# Altium PCB 13CMPA_E5-AH1-FLL357-FR4-0.8_V2.0.PcbDoc
Units mm, origin at the board's own origin, x right, y up, seen from the top; angles counter-clockwise.
Board outline 146.2 x 37.75 mm, 2 copper layers (Top Layer, Bottom Layer); 38 components, 0 nets, 148 pads, 643 vias.
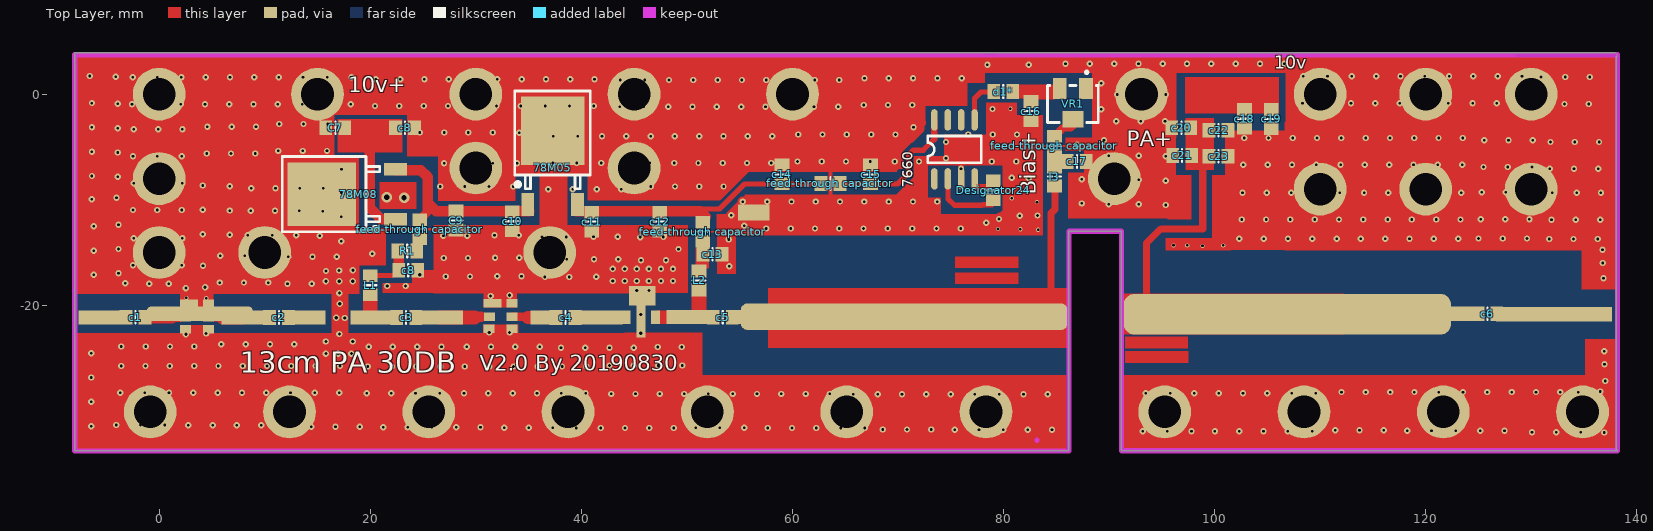
[diagram p0: Top Layer view]
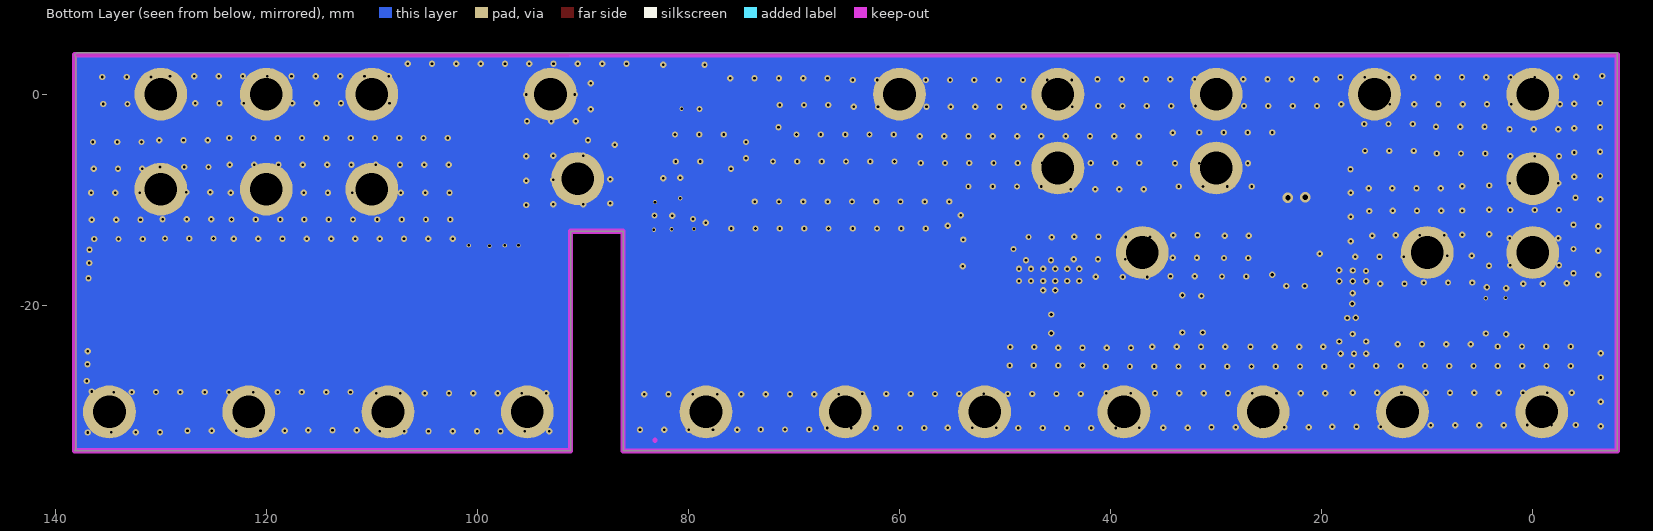
[diagram p1: Bottom Layer view, seen from below]

## Layer stack, top to bottom
Top Layer: signal copper 0.0356
Dielectric: dielectric 0.32, FR-4, Dk 4.8
Bottom Layer: signal copper 0.0356

## Board outline
138.075,3.525 138.075,-33.675 138.175,-33.775 91.175,-33.775 91.175,-12.975 86.2,-12.975 86.2,-33.775 -7.975,-33.775 -8,-33.8 -8.025,-33.775 -8.025,3.95 137.95,3.95 138.175,3.725

## Design rules (kind name [scope] priority, off if disabled: settings)
Clearance [All] p1: gap=0.254
PolygonConnect [All] p1: connectstyle=Relief reliefconductorwidth=0.254 reliefentries=4 polygonreliefangle="90 Angle"
RoutingVias [All] p1: holewidth=0.711 width=1.27 viastyle="Through Hole" minholewidth=0.711 minwidth=1.27 maxholewidth=0.711 maxwidth=1.27
SilkscreenOverComponentPads [IsPad] p1: minsilkscreentomaskgap=0.254
SolderMaskExpansion [All] p1: expansion=0.102
Width [All] p1: maxlimit=1.3 minlimit=0.254 preferedwidth=0.254
27 further rules are at their usual default settings.

## Components (designator, comment, footprint, x,y, rotation, side; value= is the part's Value field where it differs from the comment)
78M05 "7805" LC-TO-252-2 37.275,-10.45 r270 top
78M08 "78M08" LC-TO-252-2 22.4,-9.475 r0 top
7660 "lmc7660" SOP-8 73.45,-8.025 r90 top
c1 "10nf" 6-0805_N -2.253,-21.127 r0 top
c2 "10n" 6-0805_N 11.347,-21.152 r0 top
c3 "10n" 6-0805_N 23.4,-21.15 r0 top
c4 "10n" 6-0805_N 38.5,-21.15 r180 top
c5 "43p" 6-0805_N 53.4,-21.125 r180 top
c6 "100p" 6-0805_N 125.85,-20.8 r180 top
C7 "22uf" 6-0805_N 16.688,-3.179 r180 top
c8 "100p" 6-0805_N 23.6,-16.675 r0 top
c8 "10uf" 6-0805_N 23.288,-3.179 r180 top
C9 "10uf" 6-0805_N 28.125,-11.975 r270 top
c10 "10n" 6-0805_N 33.454,-12.037 r270 top
c11 "10uf" 6-0805_N 40.975,-12.075 r270 top
c12 "10n" 6-0805_N 47.425,-12.075 r270 top
c13 "100p" 6-0805_N 52.425,-15.175 r180 top
c14 "10uf" 6-0805_N 59,-7.6 r90 top
c15 "10n" 6-0805_N 67.4,-7.6 r90 top
c16 "10uf" 6-0805_N 82.6,-1.6 r90 top
c17 "100p" 6-0805_N 86.95,-6.375 r0 top
c18 "22uf" 6-0805_N 102.825,-2.325 r270 top
c19 "22uf" 6-0805_N 105.375,-2.35 r270 top
c20 "10u" 6-0805_N 96.85,-3.175 r180 top
c21 "1uf" 6-0805_N 96.925,-5.8 r180 top
c22 "100n" 6-0805_N 100.375,-3.425 r180 top
c23 "1n" 6-0805_N 100.375,-5.875 r180 top
d1* "4148*" 6-0805_N 79.975,0.25 r0 top
Designator24 "10n" 6-0805_N 79.025,-9.1 r270 top
"feed-through capacitor" "1n" 6-0805_N 24.682,-12.793 r270 top
"feed-through capacitor" "1n" 6-0805_N 63.6,-8.45 r180 top
"feed-through capacitor" "1n" 6-0805_N 84.825,-4.9 r270 top
"feed-through capacitor" "1n" 6-0805_N 51.5,-13.025 r90 top
L1 "12nh" 6-0805_N 20,-18.1 r90 top
L2 "12nh" 6-0805_N 51.15,-17.65 r270 top
l3 "12nh" 6-0805_N 84.825,-7.8 r90 top
R1 "52.3R" 6-0805_N 23.5,-14.85 r180 top
VR1 "1k" RES-ADJ-SMD_3PIN-V-L4.80-W3.50-PITCH1.25 86.575,-0.925 r0 top

## Footprints (in the part's own frame and the unit in brackets; to place one, negate y for a bottom-side part, rotate by r counter-clockwise, add the part's x,y. Pads: shape width x height; smd on the part's side, far side on the other; paste and mask are expansions set on the pad)
6-0805_N [mm] "Chip Resistor, Body 2.0x1.2mm, IPC Medium Density"
  rect 1.2x1.4 smd: 1(-0.9,0) 2(0.9,0)
  silkscreen extent 0,-0.6 0,0.6, body extent -1.07,-0.7 1.07,0.7, height 0.7
LC-TO-252-2 [mm]
  rect 2.2x1.2 smd: 1(0,-2.361) 3(-0.004,2.361)
  rect 6.5x6 smd: 2(-7,0)
  silkscreen extent -10.75,-3.57 -1.5,3.57, body extent -9.74,-3.27 0.2,3.27, height 2.44
RES-ADJ-SMD_3PIN-V-L4.80-W3.50-PITCH1.25 [mm]
  rect 1.3x2 smd: 1(1.25,1.45) 3(-1.25,1.45)
  rect 2x1.6 smd: 2(0,-1.45)
  silkscreen extent -2.4,-1.75 2.4,3.13
SOP-8 [mil]
  oval 80x24 smd: 1(0,0) 2(0,-50) 3(0,-100) 4(0,-150) 5(220,-150) 6(220,-100) 7(220,-50) 8(220,0)
  silkscreen extent 60,-175 160,25, body extent -15,-173 235,24, height 74

## Free pads (board coordinates)
  rect 5x1.336 smd: 0(-5.125,-21.15) 1(20.618,-21.152) 2(41.375,-21.15) 3(50.587,-21.127) 4(26.275,-21.15)
  rrect50% 10x1.336 smd: 0(3.85,-20.8) 1(119.725,-20.8) 4(58.775,-21.125)
  rect 4x1.336 smd: 0(7.918,-21.152) 0(13.76,-21.152)
  rect 3x1.5 smd: 0(56.35,-11.2)
  rrect50% 31x3.85 smd: 0(106.9,-20.85)
  rrect50% 31x2.5 smd: 1(70.6,-21.075)
  rect 3x1.336 smd: 3(36.7,-21.15) 14(124.05,-20.8)
  rect 2.54x1.85 smd: 5(45.761,-19.095)
  rect 0.86x1.27 smd: 6(44.237,-21.127) 6(45.634,-22.397) 6(47.031,-21.127)
  rect 0.86x2 smd: 6(45.634,-20.873)
  rect 1.7x0.81 smd: 8(2.809,-19.876) 8(31.584,-19.826)
  rect 1.05x0.81 smd: 9(2.484,-22.276) 9(2.509,-21.126) 9(4.659,-22.276) 9(4.659,-21.151) 9(4.659,-19.876) 9(31.259,-22.226) 9(31.284,-21.076) 9(33.434,-22.226) 9(33.434,-21.101) 9(33.434,-19.826)
  rect 11x1.336 smd: 16(132.175,-20.85)
  round 5 hole 3.1: 18(0,0) 19(15,0) 20(30,0) 21(37,-15) 21(45,0) 22(60,0) 24(10,-15) 25(110,0) 26(130,0) 27(120,0) 28(130,-9) 29(110,-9) 30(120,-9) 32(90.5,-8) 32(93.072,0) 35(45,-7) 36(30,-7) 37(0,-8) 38(0,-15) 39(-0.85,-30.1) 39(51.941,-30.1) 39(95.275,-30.1) 40(12.348,-30.1) 40(65.139,-30.1) 40(108.473,-30.1) 41(25.545,-30.1) 41(78.336,-30.1) 41(121.67,-30.1) 42(38.743,-30.1) 42(134.868,-30.1)

## Via types
v1: diameter 0.6, hole 0.25, Top Layer to Bottom Layer, 586 vias
v2: diameter 0.6, hole 0.3, Top Layer to Bottom Layer, 43 vias
v3: diameter 0.4, hole 0.25, Top Layer to Bottom Layer, 12 vias
v4: diameter 1, hole 0.5, Top Layer to Bottom Layer, 2 vias

## Nets (pads, with @x,y where several pads share a name; then routed paths per layer and width w, separated by ;. In a path a pad name is that pad's centre, name@x,y a point inside that pad or via, vN(x,y) a via of type N, cw(c..) or ccw(c..) an arc to the next point about the centre after c; other vN are vias at no path point)
pads on no net: 78M05.1 78M05.2 78M05.3 78M08.1 78M08.2 78M08.3 7660.1 7660.2 7660.3 7660.4 7660.5 7660.6 7660.7 7660.8 "feed-through capacitor.1" "feed-through capacitor.2" c1.1 c1.2 c2.1 c2.2 c3.1 c3.2 c4.1 c4.2 c5.1 c5.2 c6.1 c6.2 C7.1 C7.2 c8.1 c8.2 C9.1 C9.2 c10.1 c10.2 c11.1 c11.2 c12.1 c12.2 c13.1 c13.2 c14.1 c14.2 c15.1 c15.2 c16.1 c16.2 c17.1 c17.2 c18.1 c18.2 c19.1 c19.2 c20.1 c20.2 c21.1 c21.2 c22.1 c22.2 c23.1 c23.2 d1*.1 d1*.2 Designator24.1 Designator24.2 L1.1 L1.2 L2.1 L2.2 l3.1 l3.2 R1.1 R1.2 VR1.1 VR1.2 VR1.3
copper on no net: | length 209.4
  Top Layer w0.254: 18.822,-20.69 18.822,-21.134 18.967,-21.279 ; 19.348,-21.533 20.237,-20.644 20.618,-21.152 20.745,-20.771 ; 22.269,-17.088 22.396,-17.088 ; 24.279,-17.11 v2(24.682,-17.11) ; 29.559,-20.676 29.584,-20.701 29.584,-20.826
  Top Layer w0.45: 75.99,-8.025 75.99,-6.09 ; 77.26,-2.437 77.26,-1.166
  Top Layer w0.5: 50.975,-10.875 53.1,-10.875 55.475,-8.5 58.025,-8.5 ; 64.5,-8.5 69.95,-8.5 71,-7.45 71,-5.775 71.475,-5.3 72.4,-5.3 73.427,-4.273 ; 74.745,-8.525 74.745,-9.92 75.35,-10.525 77.95,-10.525 ; 77.26,-1.166 77.26,-0.422 77.882,0.2 78.45,0.2 ; 78.05,-10.475 78.9,-10.475
  Top Layer w0.6: 73.45,-4.273 73.45,-2.437
  Top Layer w0.63: 82.575,-20.875 83.906,-19.544 83.45,-19.544
  Top Layer w0.7: 70.4,-20.875 84.5,-20.875 84.5,-11.9 84.5,-11.275 84.875,-10.9 84.875,-8.825 ; 72.575,-18.7 82.85,-18.7 ; 85.425,-3.454 85.329,-3.454 85.583,-3.2 86.379,-3.2 86.65,-2.929 86.65,-2.05 ; 94.1,-19.775 95.1,-20.775 107.05,-20.775 94.325,-20.775 93.55,-20 93.55,-14.1 94.825,-12.825 ; 94.975,-12.775 98.875,-12.775 98.875,-2.95
  Top Layer w0.8: 5.225,-21.15 7.918,-21.152 ; 24.682,-11.893 25.675,-10.9 ; 33.434,-21.101 34.65,-21.101
  Top Layer w0.9: 1.184,-21.126 2,-21.126
  Top Layer w1: -0.416,-21.126 1.184,-21.126 ; 6.05,-21.15 7.918,-21.152 ; 20,-4.7 19.95,-4.75 19.95,-10.775 20.975,-11.8 ; 21.011,-11.836 22.575,-11.836 ; 22.4,-7.2 24.8,-7.2 25.45,-7.85 25.45,-10.275 ; 25.45,-11 25.45,-10.275 ; 29.284,-21.076 30.484,-21.076 ; 35.05,-11.075 26.775,-11.075 26.25,-11.075 25.45,-10.275 ; 39.55,-11.075 50.825,-11.075 51.25,-11.075 51.8,-11.625 ; 53.6,-8.125 54.85,-6.875 ; 54.025,-6.8 53.125,-7.7 53.125,-8.1 52.6,-8.625 52.6,-9.575 52.95,-9.575 55.697,-6.828 v1(55.697,-6.525) ; v1(54.2,-11.475) 55.3,-10.375 v1(55.3,-10.175) ; 69.686,-6.786 v1(69.686,-6.375) ; 70.275,-9.75 72.025,-8 ; 70.475,-3.35 71.525,-2.3 71.525,-2.275 71.525,-2.025 ; 72.025,-3.25 71.15,-4.125 70.325,-3.725 70.8,-3.725 70.8,-4.4 70.35,-4.85 70.35,-4.525 72.15,-2.725 ; 77.95,-12.375 78.475,-12.375 78.925,-11.925 79.475,-11.925 79.675,-11.725 79.9,-11.725 80.65,-10.975
  Top Layer w1.2: 34.948,-21.152 35.437,-21.152
  Top Layer w1.3: -1.35,-21.1 1.158,-21.1 ; 6.05,-21.15 6.052,-21.152 7.918,-21.152 ; 26.585,-21.15 26.587,-21.152 29.873,-21.152
  other v1: 136.906,-32.05 130.075,-32.025 132.378,-32.025 134.681,-32.025 100.031,-31.95 102.333,-31.95 104.636,-31.95 106.939,-31.95 109.242,-31.95 93.2,-31.925 95.503,-31.925 97.806,-31.925 118.256,-31.875 120.558,-31.875 122.861,-31.875 125.164,-31.875 127.467,-31.875 111.425,-31.85 113.728,-31.85 116.031,-31.85 75.381,-31.8 77.683,-31.8 79.986,-31.8 82.289,-31.8 84.592,-31.8 68.55,-31.775 70.853,-31.775 73.156,-31.775 39.531,-31.625 41.833,-31.625 44.136,-31.625 46.439,-31.625 48.742,-31.625 57.656,-31.625 59.958,-31.625 62.261,-31.625 64.564,-31.625 66.867,-31.625 32.7,-31.6 35.003,-31.6 37.306,-31.6 50.825,-31.6 53.128,-31.6 55.431,-31.6 21.231,-31.55 23.533,-31.55 25.836,-31.55 28.139,-31.55 30.442,-31.55 14.4,-31.525 16.703,-31.525 19.006,-31.525 -6.45,-31.45 2.756,-31.375 5.058,-31.375 7.361,-31.375 9.664,-31.375 11.967,-31.375 -4.075,-31.35 -1.772,-31.35 0.531,-31.35 -6.45,-29.147 65.775,-28.425 68.078,-28.425 70.381,-28.425 72.683,-28.425 74.986,-28.425 77.289,-28.425 79.592,-28.425 81.894,-28.425 84.197,-28.425 42.825,-28.4 45.128,-28.4 47.431,-28.4 49.733,-28.4 52.036,-28.4 54.339,-28.4 56.642,-28.4 58.944,-28.4 61.247,-28.4 63.55,-28.4 19.675,-28.35 21.978,-28.35 24.281,-28.35 26.583,-28.35 28.886,-28.35 31.189,-28.35 33.492,-28.35 35.794,-28.35 38.097,-28.35 40.4,-28.35 93.481,-28.35 95.783,-28.35 98.086,-28.35 100.389,-28.35 102.692,-28.35 104.994,-28.35 107.297,-28.35 109.6,-28.35 -3.675,-28.3 -1.372,-28.3 0.931,-28.3 3.233,-28.3 5.536,-28.3 7.839,-28.3 10.142,-28.3 12.444,-28.3 14.747,-28.3 17.05,-28.3 112.025,-28.225 114.328,-28.225 116.631,-28.225 118.933,-28.225 121.236,-28.225 123.539,-28.225 125.842,-28.225 128.144,-28.225 130.447,-28.225 132.75,-28.225 134.45,-28.225 136.55,-28.175 137,-27.175 -6.45,-26.844 19.75,-25.8 22.053,-25.8 24.356,-25.8 26.658,-25.8 28.961,-25.8 31.264,-25.8 33.567,-25.8 35.869,-25.8 38.172,-25.8 40.475,-25.8 -3.6,-25.75 -1.297,-25.75 1.006,-25.75 3.308,-25.75 5.611,-25.75 7.914,-25.75 10.217,-25.75 12.519,-25.75 14.822,-25.75 17.125,-25.75 42.667,-25.7 44.969,-25.7 47.272,-25.7 49.575,-25.7 136.95,-25.575 -6.45,-24.542 136.925,-24.35 38.067,-24.025 40.369,-24.025 42.672,-24.025 44.975,-24.025 47.225,-23.95 49.528,-23.95 19.842,-23.925 22.144,-23.925 24.447,-23.925 26.75,-23.925 29.142,-23.925 31.444,-23.925 33.747,-23.925 36.05,-23.925 -3.583,-23.9 -1.281,-23.9 1.022,-23.9 3.325,-23.9 5.892,-23.7 8.194,-23.7 10.497,-23.7 12.8,-23.7 -0.95,-17.95 0.9,-17.95 12.15,-17.95 14.453,-17.95 -3.225,-17.9 5.725,-17.85 8.028,-17.85 10.331,-17.85 136.85,-17.425 36.547,-17.325 38.85,-17.325 41.422,-17.3 27.147,-17.275 29.45,-17.275 32.022,-17.25 34.325,-17.25 -6.2,-17.122 -3.85,-16.972 54.025,-16.3 4.15,-16.25 -2.481,-16.2 -0.178,-16.2 2.125,-16.2 136.775,-16 45.65,-15.725 48.025,-15.725 36.325,-15.65 38.628,-15.65 41.2,-15.625 43.503,-15.625 26.95,-15.525 29.253,-15.525 31.825,-15.5 34.128,-15.5 12.225,-15.4 14.528,-15.4 16.831,-15.4 5.8,-15.3 8.103,-15.3 10.406,-15.3 20.175,-15.125 -6.2,-14.819 136.75,-14.75 -3.85,-14.669 49.2,-14.675 17.25,-13.931 53.975,-13.775 131.7,-13.725 134.003,-13.725 136.306,-13.725 102.35,-13.7 104.653,-13.7 106.956,-13.7 109.258,-13.7 111.561,-13.7 113.864,-13.7 116.167,-13.7 118.469,-13.7 120.772,-13.7 123.075,-13.7 125,-13.675 127.303,-13.675 129.606,-13.675 -2.406,-13.65 -0.103,-13.65 2.2,-13.65 45.575,-13.55 36.275,-13.525 38.578,-13.525 47.775,-13.525 41.15,-13.5 43.453,-13.5 15.225,-13.4 26.9,-13.4 29.203,-13.4 8.394,-13.375 10.697,-13.375 13,-13.375 31.775,-13.375 34.078,-13.375 6.675,-13.331 4.125,-13.256 57.528,-12.725 59.831,-12.725 62.133,-12.725 64.436,-12.725 66.739,-12.725 69.042,-12.725 71.344,-12.725 73.647,-12.725 75.95,-12.725 -6.2,-12.517 55.425,-12.475 -3.85,-12.367 78.375,-12.175 131.925,-11.9 134.228,-11.9 136.531,-11.9 102.575,-11.875 104.878,-11.875 107.181,-11.875 109.483,-11.875 111.786,-11.875 114.089,-11.875 116.392,-11.875 118.694,-11.875 120.997,-11.875 123.3,-11.875 125.225,-11.85 127.528,-11.85 129.831,-11.85 79.575,-11.825 17.25,-11.628 81.525,-11.525 83.225,-11.5 15.5,-11.075 8.669,-11.05 10.972,-11.05 13.275,-11.05 6.675,-11.028 -2.481,-10.975 -0.178,-10.975 2.125,-10.975 4.125,-10.953 95.375,-10.5 89.975,-10.425 92.825,-10.425 87.425,-10.35 57.603,-10.175 59.906,-10.175 62.208,-10.175 64.511,-10.175 66.814,-10.175 69.117,-10.175 71.419,-10.175 73.722,-10.175 -6.4,-9.95 -4.05,-9.8 132,-9.35 134.303,-9.35 136.606,-9.35 17.25,-9.325 102.65,-9.325 104.953,-9.325 107.256,-9.325 109.558,-9.325 111.861,-9.325 114.164,-9.325 116.467,-9.325 118.769,-9.325 121.072,-9.325 123.375,-9.325 125.3,-9.3 127.603,-9.3 129.906,-9.3 36.867,-9 39.169,-9 41.472,-9 43.775,-9 15.55,-8.925 8.719,-8.9 11.022,-8.9 13.325,-8.9 26.642,-8.75 28.944,-8.75 31.247,-8.75 33.55,-8.75 46.567,-8.75 48.869,-8.75 51.172,-8.75 53.475,-8.75 6.675,-8.725 4.125,-8.65 -2.406,-8.425 -0.103,-8.425 2.2,-8.425 95.375,-8.197 89.975,-8.122 92.825,-8.122 87.425,-8.047 82.406,-7.95 80.775,-7.925 -3.925,-7.825 -6.375,-7.75 17.275,-7.1 131.75,-7.075 134.053,-7.075 136.356,-7.075 75.975,-7.05 125.475,-6.9 127.778,-6.9 130.081,-6.9 102.725,-6.7 105.028,-6.7 107.331,-6.7 109.633,-6.7 111.936,-6.7 114.239,-6.7 116.542,-6.7 118.844,-6.7 121.147,-6.7 123.45,-6.7 26.992,-6.55 29.294,-6.55 31.597,-6.55 33.9,-6.55 37.275,-6.525 39.578,-6.525 41.881,-6.525 44.183,-6.525 46.486,-6.525 48.789,-6.525 51.092,-6.525 53.394,-6.525 58,-6.525 60.475,-6.375 62.778,-6.375 65.081,-6.375 67.383,-6.375 71.989,-6.375 78.897,-6.375 81.2,-6.375 74.55,-6.075 -2.481,-5.875 -0.178,-5.875 2.125,-5.875 95.375,-5.894 89.975,-5.819 92.825,-5.819 4.494,-5.625 6.797,-5.625 9.1,-5.625 -3.925,-5.522 -6.375,-5.447 11.294,-5.375 13.597,-5.375 15.9,-5.375 87,-4.8 74.55,-4.525 131.825,-4.525 134.128,-4.525 136.431,-4.525 89.525,-4.375 125.55,-4.35 127.853,-4.35 130.156,-4.35 102.8,-4.15 105.103,-4.15 107.406,-4.15 109.708,-4.15 112.011,-4.15 114.314,-4.15 116.617,-4.15 118.919,-4.15 121.222,-4.15 123.525,-4.15 37.35,-3.975 39.653,-3.975 41.956,-3.975 44.258,-3.975 46.561,-3.975 48.864,-3.975 51.167,-3.975 53.469,-3.975 55.772,-3.975 58.075,-3.975 60.55,-3.825 62.853,-3.825 65.156,-3.825 67.458,-3.825 69.761,-3.825 76.669,-3.825 78.972,-3.825 81.275,-3.825 34.1,-3.65 24.692,-3.625 26.994,-3.625 29.297,-3.625 31.6,-3.625 -2.406,-3.325 -0.103,-3.325 2.2,-3.325 -3.925,-3.219 -6.375,-3.144 71.475,-3.125 4.569,-3.075 6.872,-3.075 9.175,-3.075 11.369,-2.825 13.672,-2.825 15.975,-2.825 90.694,-2.575 92.997,-2.575 95.3,-2.575 89.275,-1.425 78.95,-1.4 43.625,-1.2 45.928,-1.2 48.231,-1.2 50.533,-1.2 52.836,-1.2 55.139,-1.2 57.442,-1.2 59.744,-1.2 62.047,-1.2 64.35,-1.2 20.45,-1.125 22.753,-1.125 25.056,-1.125 27.358,-1.125 29.661,-1.125 31.964,-1.125 34.267,-1.125 36.569,-1.125 38.872,-1.125 41.175,-1.125 66.75,-1.025 69.053,-1.025 71.356,-1.025 -2.575,-0.95 -0.272,-0.95 2.031,-0.95 4.333,-0.95 6.636,-0.95 8.939,-0.95 11.242,-0.95 13.544,-0.95 15.847,-0.95 18.15,-0.95 130.85,-0.925 133.153,-0.925 135.456,-0.925 -3.925,-0.917 108.325,-0.85 110.628,-0.85 112.931,-0.85 115.233,-0.85 117.536,-0.85 119.839,-0.85 122.142,-0.85 124.444,-0.85 126.747,-0.85 129.05,-0.85 -6.375,-0.842 90.769,-0.025 93.072,-0.025 95.375,-0.025 89.275,1.025 43.7,1.35 46.003,1.35 48.306,1.35 50.608,1.35 52.911,1.35 55.214,1.35 57.517,1.35 59.819,1.35 62.122,1.35 64.425,1.35 20.525,1.425 22.828,1.425 25.131,1.425 27.433,1.425 29.736,1.425 32.039,1.425 34.342,1.425 36.644,1.425 38.947,1.425 41.25,1.425 66.825,1.525 69.128,1.525 71.431,1.525 73.75,1.525 76.053,1.525 -2.5,1.6 -0.197,1.6 2.106,1.6 4.408,1.6 6.711,1.6 9.014,1.6 11.317,1.6 13.619,1.6 15.922,1.6 18.225,1.6 130.925,1.625 133.228,1.625 135.531,1.625 -4.125,1.65 108.4,1.7 110.703,1.7 113.006,1.7 115.308,1.7 117.611,1.7 119.914,1.7 122.217,1.7 124.519,1.7 126.822,1.7 129.125,1.7 -6.575,1.725 78.475,2.8 82.4,2.8 85.875,2.875 88.178,2.875 90.481,2.875 92.783,2.875 95.086,2.875 97.389,2.875 99.692,2.875 101.994,2.875 104.297,2.875 106.6,2.875
  other v2: 15.792,-24.581 16.935,-24.581 18.205,-24.581 15.792,-23.438 18.332,-23.438 2.525,-22.75 17.075,-22.725 4.45,-22.675 45.634,-22.651 31.275,-22.575 33.2,-22.575 17.575,-21.2 16.775,-21.175 45.634,-20.873 17.1,-19.85 31.4,-19.125 33.2,-19.05 17.075,-18.85 45.253,-18.587 46.396,-18.587 2.525,-18.375 4.35,-18.3 21.6,-18.175 23.35,-18.175 15.792,-17.723 17.062,-17.723 18.332,-17.723 42.967,-17.698 44.11,-17.698 45.253,-17.698 46.396,-17.698 47.539,-17.698 48.682,-17.698 15.8,-16.75 17.05,-16.7 18.35,-16.675 42.967,-16.555 44.11,-16.555 45.253,-16.555 46.396,-16.555 47.539,-16.555 48.682,-16.555
  other v3: 4.45,-19.325 2.575,-19.3 98.85,-14.375 96.1,-14.325 97.4,-14.325 100.825,-14.325 83.275,-12.85 81.6,-12.8 79.475,-12.775 83.175,-10.225 80.775,-9.85 80.65,-1.375
  other v4: 23.2,-9.8 21.55,-9.775

## Keep-outs
Keep-Out Layer:
  lines w0.5: 86.1,-33.8 -8,-33.8 -8,3.725 138.175,3.725 138.175,-33.775 91.175,-33.775 91.175,-12.975 86.35,-12.975 ; 86.2,-33.775 86.2,-12.975 ; 83.181,-32.794 83.181,-32.794

## Other copper
Top Layer:
  rectangle: 78.4,-13.375 83.75,-12.075
  rectangle: 95.55,-11.875 97.825,-7.65
  rectangle: 99.775,-13.85 101.875,-7.675
  rectangle: 95.35,-14.8 101.55,-13.625
  rectangle: 21.025,-12.925 24.275,-12.675
  rectangle: 24,-12.9 26.7,-12.7
  rectangle: 20.85,-10.875 24.375,-8.325
  rectangle: 49.6,-13.1 53.375,-12.95
  rectangle: 85.875,-5.4 87.625,-4.125
  rectangle: 83.225,-5 88.075,-4.8
  rectangle: 63.425,-9.975 63.8,-6.55
  rectangle: 60.75,-8.75 62.425,-8.25
  rectangle: 58.025,-8.75 61,-8.25
  rectangle: 101,-14.775 106.8,-3.425
  rectangle: 86.1,-11.8 87.85,-7.425
  rectangle: 82.025,-0.5 84.875,0.9
  rectangle: 57.7,-24.05 86.15,-18.35
  rectangle: 91.525,-25.45 97.525,-24.35
  rectangle: 91.5,-24.075 97.5,-22.975
  rectangle: 75.4,-16.475 81.4,-15.375
  rectangle: 75.425,-18 81.425,-16.9
  rectangle: 91.35,-22.75 112.25,-18.9
  rectangle: 81.225,-11.6 83.75,-1.975
  rectangle: 81.275,-4.6 83.275,-2.925
  rectangle: 76.925,2 80.225,3.725
  rectangle: 72.275,-1.125 76.575,1.275
  rectangle: 78.35,-3.825 81.275,-0.8
  rectangle: 72.625,-6.75 74.975,-5.875
  rectangle: 74.367,-6.775 83.325,-3.825
  rectangle: 75.725,-8.475 76.275,-6.65
  rectangle: 71.05,-9.925 72.825,-8.7
  rectangle: 22.2,-16.4 23.175,-15.025
  rectangle: 36.025,-13.15 38.675,-7
  rectangle: 26.4,-10.1 33.775,-7.475
  rectangle: 40.6,-10.075 51.172,-7.225
  rectangle: 26.4,-7.7 51,-2.25
  rectangle: 50.45,-20.85 51.85,-19.05
  rectangle: 19.325,-20.575 20.7,-19.425
  rectangle: 78.4,-12.075 83.75,-11.35
  rectangle: 81.425,-0.4 82.025,0.9
  rectangle: 79.925,-8.625 83.4,-6.775
  rectangle: 77.285,-9.075 78.875,-8.525
  rectangle: 79.925,-12.075 83.4,-8.625
  rectangle: 71.45,-9.3 72.825,-5.875
  rectangle: 55.825,-7.375 69.9,-6.925
  rectangle: 72.75,-11.5 74.1,-9.775
  rectangle: 55.45,-11.6 72.825,-9.525
  rectangle: 49.775,-10.075 53.125,-6.775
  rectangle: 49.85,-7.1 70.5,-2.425
  rectangle: 72.525,1.075 78.25,3.75
  rectangle: 82.075,-0.6 83.05,0.2
  rectangle: 106.6,-14.825 128.5,-2.65
  rectangle: 52.825,-13.375 78.4,-11.35
  rectangle: 16.325,-19.501 17.925,-18.575
  rectangle: 41.6,-13.8 50.125,-12.4
  rectangle: 45.575,-18.825 50.125,-13.55
  rectangle: 44.1,-26.85 51.5,-22.6
  rectangle: 44.05,-33.65 85.975,-26.625
  rectangle: 1.975,-19.875 5.15,-17.55
  rectangle: 30.725,-20.2 33.925,-18.275
  rectangle: 40.6,-29.475 44.1,-22.8
  rectangle: 26,-18.875 45.575,-12.4
  rectangle: 16.325,-23.438 17.925,-19.501
  rectangle: -8.075,-33.675 19.034,-22.65
  rectangle: 18.775,-33.675 44.525,-22.625
  rectangle: 30.75,-23.55 31.775,-22.525
  rectangle: 32.875,-23.725 34,-22.5
  rectangle: 30.675,-22.9 34.025,-21.825
  rectangle: 26.4,-2.825 72.6,3.75
  rectangle: 79.3,2 128.5,3.75
  rectangle: 87.625,-11.8 96.35,-4.125
  rectangle: 97.225,-7.175 99.925,-2.275
  rectangle: 106.725,-7.15 128.525,2.35
  rectangle: 88.375,-4.125 96.375,2.425
  rectangle: 128.5,-14.825 138.075,3.525
  rectangle: 24.825,-17.65 26.6,-16.65
  rectangle: 47.175,-21.775 48.5,-20.475
  rectangle: 97.2,-1.85 106.1,1.625
  rectangle: 135.1,-26.625 138.025,-23.2
  rectangle: 134.775,-18.5 138.05,-14.825
  rectangle: 2.975,-22.8 4.275,-21.875
  rectangle: 3.65,-20.275 4.175,-19.775
  rectangle: 20.025,-17.4 22.25,-16.95
  rectangle: 19.775,-20.825 20.125,-19.125
  rectangle: 52.85,-17.025 54.65,-13.375
  rectangle: 18.8,-16.25 21.475,-12.75
  rectangle: 23.95,-18.85 26,-17
  rectangle: 21.15,-18.85 24.025,-17.875
  rectangle: -8.05,-18.925 18.975,-13.675
  rectangle: -8.025,-14.9 16.625,3.95
  rectangle: 16.625,-14.9 18.925,-5.825
  rectangle: 16.625,-1.95 27.125,3.95
  rectangle: 23.475,-5.925 27.475,-1.8
  rectangle: 16.875,-5.525 23.075,-2.35
  rectangle: 91.375,-33.575 138.1,-26.625
  rectangle: 50.925,-16.425 51.941,-15.65
  rectangle: 50.825,-16.525 52.1,-14.525
Bottom Layer:
  rectangle: -7.925,-33.8 86.2,3.725
  rectangle: 91.225,-33.825 138.1,3.55
  rectangle: 86.2,-13.125 91.325,3.725

## Silkscreen, mask and mechanical layers (free items; w line width, h text height)
Top Overlay:
  text "10v" at 105.675,2.425 h1.2
  text "10v+" at 17.9,0.2 h1.5
  text "PA+" at 91.7,-4.95 h1.5
  text "Bias+" at 83.075,-9.55 h1.5 r90
  text "V2.0 By 20190830" at 30.35,-26.2 h1.5
  text "13cm PA 30DB" at 7.625,-26.375 h2
Top Solder:
  rectangle: 23.325,-12.9 28.125,-12.7
  rectangle: 48.742,-13.1 54.075,-12.95
  rectangle: 82.575,-5 87.25,-4.8
  rectangle: 63.425,-10.575 63.8,-5.894
  rectangle: 83.75,-16.05 100.975,-11.6
  rectangle: 100.85,-7.175 106.55,-2.675
  rectangle: 50.625,-25.95 137.65,-13.95
  rectangle: -8,-22.525 51.3,-19.025
  rectangle: 96.725,-14.475 102.025,-2.35
  rectangle: 80.35,-16.075 100.75,-12.225
  rectangle: 84.075,-12 86.175,-4.2
  rectangle: 85.75,-1.875 89.125,1.85
  rectangle: 97.2,-1.85 106.1,1.625
  rectangle: 23.35,-1.125 27.275,1.975
  rectangle: 16.875,-5.475 23.075,-2.35
  rectangle: -8.1,-26.3 -3.475,-15.85
  rectangle: 23.475,-5.925 25.575,-1.8
  rectangle: 14.65,-5.825 16.625,-2.4
  rectangle: 100.85,-6.75 106.65,-2.65
Bottom Solder:
  rectangle: -6.35,-32.4 138.175,3.725
  rectangle: -8,-33.8 1.225,4.025
  rectangle: 91.2,-33.775 138.075,-27.025
  rectangle: -8,-33.8 86.175,-27.7
Mechanical 1:
  lines w0.1: 5.303,-21.963 10.303,-21.963 10.303,-20.627 5.303,-20.627 ; 5.328,-21.838 5.328,-20.502 ; 16.019,-22.703 16.019,-19.631 ; 18.407,-22.703 18.407,-19.631 ; 20.11,-20.499 20.31,-20.499 ; 20.11,-16.769 20.31,-16.769 ; 29.286,-21.875 24.286,-21.875 24.286,-20.539 29.286,-20.539 ; 12.816,-21.835 12.816,-20.499 15.816,-20.499 15.816,-21.835 12.816,-21.835 ; 15.435,-25.167 18.991,-25.167 18.991,-22.703 15.435,-22.703 15.435,-25.167 ; 15.435,-19.631 15.435,-17.167 18.991,-17.167 18.991,-19.631 15.435,-19.631 ; 18.61,-21.835 18.61,-20.499 21.61,-20.499 21.61,-21.835 18.61,-21.835
Mechanical 15:
  lines w0.003: 101.175,14.34 101.225,14.39